# Altium PCB Arduino_MEGA_2560-Rev3.PcbDoc (part 2 of 2)
Units mil, origin at the board's own origin, x right, y up, seen from the top; angles counter-clockwise.
Board outline 4000 x 2100 mil, 2 copper layers (Top, Bottom); 63 components, 112 nets, 394 pads, 154 vias.
Unrouted connection lines stored in the file: 2.
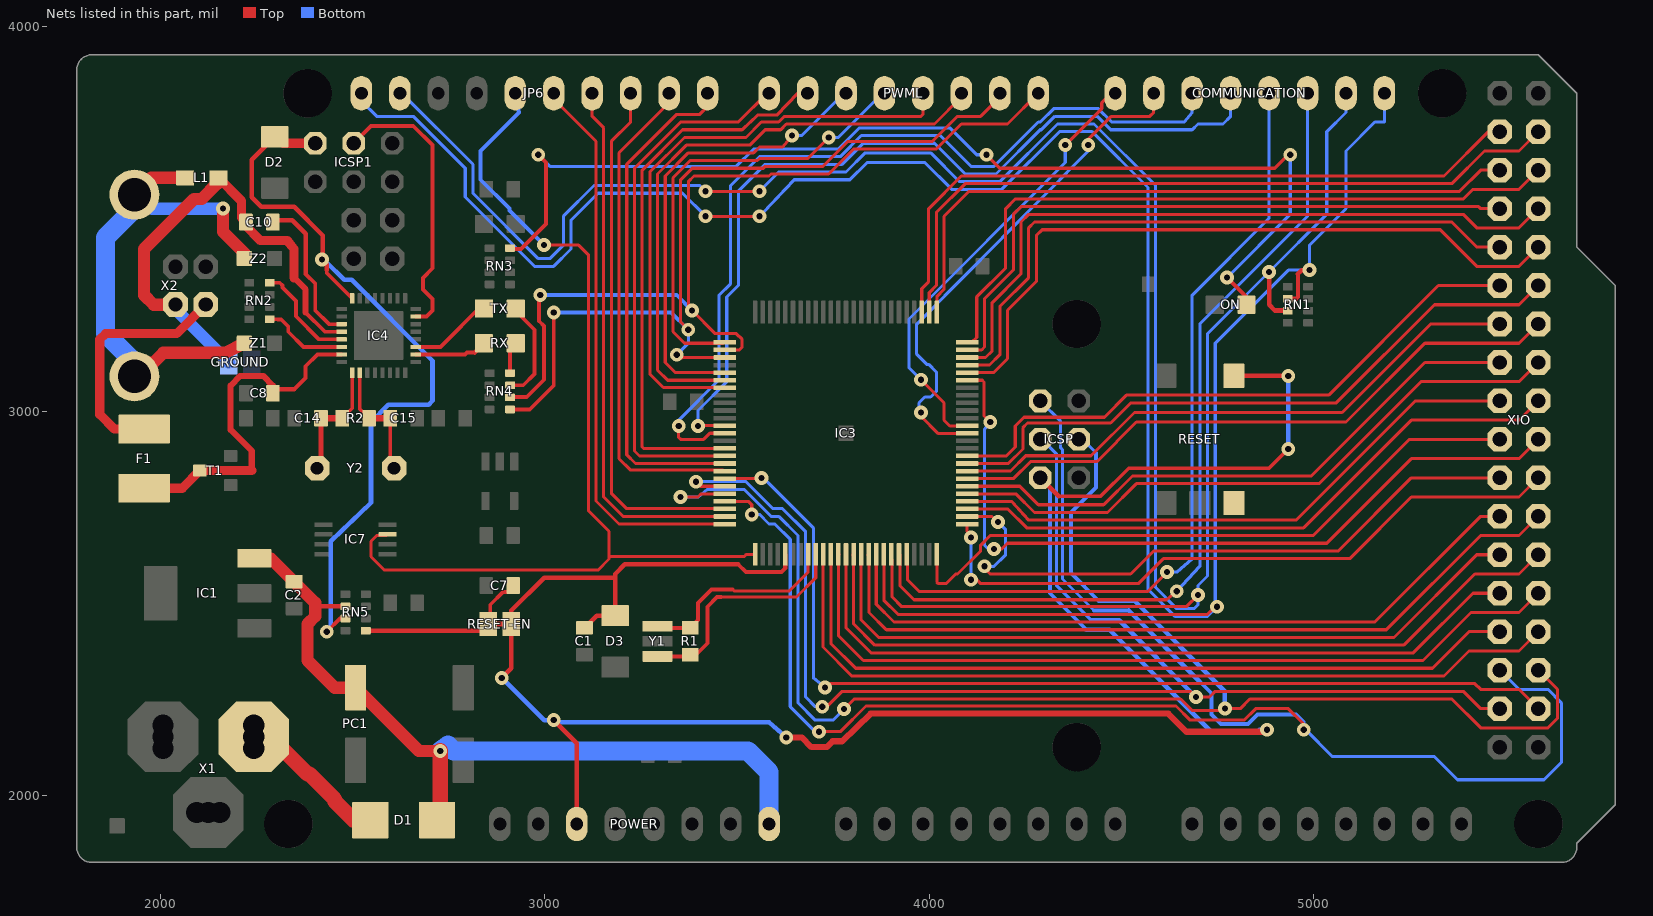
[diagram p2: the nets of this part, all layers, seen from the top]

## Via types
v1: diameter 36/36 (per signal layer), hole 16, Top to Bottom, 154 vias

## Nets (pads, with @x,y where several pads share a name; then routed paths per layer and width w, separated by ;. In a path a pad name is that pad's centre, name@x,y a point inside that pad or via, vN(x,y) a via of type N, cw(c..) or ccw(c..) an arc to the next point about the centre after c; other vN are vias at no path point) (continued)
N$3: ON.A RN3.8 | length 2854.3
  Top w8: v1(4148.46,3666.77) 4183.46,3631.77 4898.46,3631.77 4933.46,3666.77 v1(4938.46,3666.77) ; ON.A@4823.46,3286.77 ON.A@4824.8,3276.77
  Top w10: RN3.8@2910.03,3424.01 2920.78,3421.77 2938.46,3421.77 3003.46,3486.77 3003.46,3646.77 v1(2983.46,3666.77) ; v1(4774.09,3347.4) 4823.46,3298.03 ON.A@4823.46,3286.77
  Bottom w8: v1(2983.46,3666.77) 3013.46,3636.77 3498.46,3636.77 3543.46,3681.77 3763.46,3681.77 3818.46,3736.77 4053.46,3736.77 4123.46,3666.77 4143.46,3666.77 v1(4148.46,3666.77) ; v1(4774.09,3347.4) 4938.46,3511.77 v1(4938.46,3666.77)
N$54: RN4.4 RX.A | length 82.9
  Top w10: RN4.4@2910.03,3099.01 2910.03,3158.34 RX.A@2924.8,3176.77
N$55: RN4.3 TX.A | length 265.7
  Top w10: RN4.3@2910.03,3067.52 2944.21,3067.52 2973.46,3096.77 2973.46,3211.77 2924.8,3260.43 TX.A@2924.8,3266.77
PA0: IC3.78 XIO.3 | length 1844.4
  Top w8: IC3.78@3980.31,3257.73 3980.31,3318.62 3998.46,3336.77 3998.46,3526.77 4083.46,3611.77 5338.46,3611.77 5453.46,3726.77 XIO.3@5483.46,3726.77
PA1: IC3.77 XIO.4 | length 1918.7
  Top w8: IC3.77@4000,3257.73 4000,3308.31 4018.46,3326.77 4018.46,3516.77 4093.46,3591.77 5358.46,3591.77 5443.46,3676.77 5533.46,3676.77 XIO.4@5583.46,3726.77
PA2: IC3.76 XIO.5 | length 1751.5
  Top w8: IC3.76@4019.68,3257.73 4019.68,3297.99 4038.46,3316.77 4038.46,3506.77 4103.46,3571.77 5378.46,3571.77 5433.46,3626.77 XIO.5@5483.46,3626.77
PA3: IC3.75 XIO.6 | length 1822.8
  Top w8: IC3.75@4098.42,3178.99 4110.68,3178.99 4123.46,3191.77 4123.46,3297.4 4198.46,3372.4 4198.46,3526.77 4223.46,3551.77 5388.46,3551.77 5413.46,3576.77 5533.46,3576.77 XIO.6@5583.46,3626.77
PA4: IC3.74 XIO.7 | length 1699.6
  Top w8: IC3.74@4098.42,3159.31 4136,3159.31 4143.46,3166.77 4143.46,3292.4 4218.46,3367.4 4218.46,3511.77 4238.46,3531.77 5428.46,3531.77 5433.46,3526.77 XIO.7@5483.46,3526.77
PA5: IC3.73 XIO.8 | length 1826.7
  Top w8: IC3.73@4098.42,3139.62 4146.31,3139.62 4163.46,3156.77 4163.46,3282.4 4238.46,3357.4 4238.46,3491.77 4258.46,3511.77 5388.46,3511.77 5423.46,3476.77 5533.46,3476.77 XIO.8@5583.46,3526.77
PA6: IC3.72 XIO.9 | length 1715.4
  Top w8: IC3.72@4098.42,3119.94 4156.63,3119.94 4183.46,3146.77 4183.46,3272.4 4258.46,3347.4 4258.46,3476.77 4273.46,3491.77 5358.46,3491.77 5423.46,3426.77 XIO.9@5483.46,3426.77
PA7: IC3.71 XIO.10 | length 1842.5
  Top w8: IC3.71@4098.42,3100.25 4166.94,3100.25 4203.46,3136.77 4203.46,3262.4 4278.46,3337.4 4278.46,3456.77 4293.46,3471.77 5328.46,3471.77 5423.46,3376.77 5533.46,3376.77 XIO.10@5583.46,3426.77
PB0: IC3.19 XIO.34 | length 2613.5
  Top w8: IC3.19@3468.5,2824.66 3570.57,2824.66 v1(3563.46,2826.77) ; v1(3728.46,2281.77) 3733.46,2281.77 3743.46,2291.77 5418.46,2291.77 5433.46,2276.77 5533.46,2276.77 XIO.34@5583.46,2226.77
  Bottom w8: v1(3563.46,2826.77) 3568.46,2826.77 3698.46,2696.77 3698.46,2306.77 v1(3728.46,2281.77)
PB1: IC3.20 ICSP.3 XIO.33 | length 3594.7
  Top w8: v1(3393.46,2816.77) 3405.26,2804.97 IC3.20@3468.5,2804.97 ; v1(3721.65,2231.77) 3733.46,2231.77 3773.46,2271.77 4678.46,2271.77 v1(4693.46,2256.77) 4728.46,2256.77 4743.46,2271.77 5388.46,2271.77 5433.46,2226.77 XIO.33@5483.46,2226.77
  Bottom w8: v1(3393.46,2816.77) 3523.46,2816.77 3593.46,2746.77 3618.46,2746.77 3678.46,2686.77 3678.46,2256.77 3703.46,2231.77 v1(3721.65,2231.77) ; ICSP.3@4293.46,2926.77 4330.46,2889.77 4330.46,2547.57 4421.26,2456.77
  Bottom w10: ICSP.3@4288.46,2926.77 ICSP.3@4293.46,2926.77
  Bottom w12: 4421.26,2456.77 4493.46,2456.77 v1(4693.46,2256.77)
PB2: IC3.21 ICSP.4 XIO.32 | length 4115.2
  Top w8: v1(3353.46,2776.77) 3398.46,2776.77 3406.98,2785.29 IC3.21@3468.5,2785.29 ; v1(3778.46,2225.39) 3804.84,2251.77 4653.46,2251.77 4683.46,2221.77 4763.46,2221.77 v1(4768.46,2226.77) 4808.46,2226.77 4833.46,2251.77 5358.46,2251.77 5433.46,2176.77 5608.46,2176.77 5633.46,2201.77 5633.46,2276.77 XIO.32@5583.46,2326.77
  Bottom w8: v1(3353.46,2776.77) 3398.46,2776.77 3423.46,2796.77 3518.46,2796.77 3588.46,2726.77 3608.46,2726.77 3658.46,2676.77 3658.46,2241.77 3703.46,2196.77 3749.84,2196.77 v1(3778.46,2225.39) ; ICSP.4@4388.46,2926.77 4398.46,2926.77 4433.46,2891.77
  Bottom w10: 4433.46,2891.77 4433.46,2801.77 4368.46,2736.77 4368.46,2578.94 4440.63,2506.77
  Bottom w12: 4440.63,2506.77 4533.46,2506.77 4768.46,2271.77 v1(4768.46,2226.77)
PB3: IC3.22 ICSP.1 XIO.31 | length 4543.3
  Top w8: IC3.22@3468.5,2765.6 3529.63,2765.6 3538.46,2756.77 v1(3538.46,2731.77) ; v1(3713.46,2166.77) 3768.46,2166.77 3835.46,2233.77 4641.46,2233.77 4678.46,2196.77 4818.46,2196.77 4848.46,2226.77 4933.46,2226.77 4973.46,2186.77 v1(4973.46,2171.77)
  Bottom w8: v1(3538.46,2731.77) 3558.46,2731.77 3583.46,2706.77 3598.46,2706.77 3638.46,2666.77 3638.46,2231.77 3703.46,2166.77 v1(3713.46,2166.77) ; ICSP.1@4288.46,3026.77 4341.46,2973.77 4341.46,2904.77 4346.46,2899.77 4346.46,2563.77 4428.46,2481.77 ; v1(4973.46,2171.77) 4978.46,2171.77 5048.46,2101.77 5313.46,2101.77 5373.46,2041.77 5598.46,2041.77 5643.46,2086.77 5643.46,2241.77 5608.46,2276.77 5533.46,2276.77 XIO.31@5483.46,2326.77
  Bottom w10: 4428.46,2481.77 4518.46,2481.77 ; 4703.46,2296.77 4733.46,2266.77 4733.46,2211.77 4758.46,2186.77 4828.46,2186.77 4853.46,2211.77 4953.46,2211.77 4973.46,2191.77 v1(4973.46,2171.77)
  Bottom w12: 4518.46,2481.77 4703.46,2296.77
PB4: IC3.23 JP6.8 | length 1382.6
  Top w8: JP6.8@3223.46,3826.77 3223.46,3751.77 3173.46,3701.77 3173.46,2786.77 3213.46,2746.77 3473.46,2746.77 3472.61,2745.92 IC3.23@3468.5,2745.92
PB5: IC3.24 JP6.7 | length 1398.4
  Top w8: JP6.7@3123.46,3826.77 3123.46,3766.77 3153.46,3736.77 3153.46,2776.77 3204,2726.23 IC3.24@3468.5,2726.23
PB6: IC3.25 JP6.6 | length 1473.3
  Top w8: JP6.6@3023.46,3826.77 3033.46,3801.77 3133.46,3701.77 3133.46,2766.77 3193.46,2706.77 3473.46,2706.77 3473.24,2706.55 IC3.25@3468.5,2706.55
PB7: IC3.26 IC7.3 JP6.5 | length 2563.8
  Top w8: IC7.3@2591.65,2679.53 2588.89,2676.77 2563.46,2676.77 2548.46,2661.77 2548.46,2621.77 2583.46,2586.77 3138.46,2586.77 3167.42,2615.73 3167.42,2622.81 ; v1(2998.46,3431.77) 3088.46,3431.77 3113.46,3406.77 3113.46,2741.77 3167.42,2687.81 3167.42,2622.81 ; 3262.42,2621.77 3263.46,2622.81 ; IC3.26@3547.24,2627.81 3524.46,2627.77 3519.5,2622.81 3263.46,2622.81 ; 3167.42,2622.81 3263.46,2622.81
  Bottom w10: JP6.5@2923.46,3826.77 2933.46,3776.77 2833.46,3676.77 2833.46,3601.77 2908.46,3526.77 2908.46,3521.77 v1(2998.46,3431.77)
PC0: IC3.53 XIO.18 | length 1642.1
  Top w8: IC3.53@4098.42,2745.92 4204.31,2745.92 4253.46,2696.77 4973.46,2696.77 5253.46,2976.77 5533.46,2976.77 XIO.18@5583.46,3026.77
PC1: IC3.54 XIO.17 | length 1535.2
  Top w8: IC3.54@4098.42,2765.6 4214.63,2765.6 4258.46,2716.77 4953.46,2716.77 5263.46,3026.77 XIO.17@5483.46,3026.77
PC2: IC3.55 XIO.16 | length 1666.7
  Top w8: IC3.55@4098.42,2785.29 4224.94,2785.29 4273.46,2736.77 4463.46,2736.77 4538.46,2811.77 5013.46,2811.77 5278.46,3076.77 5533.46,3076.77 XIO.16@5583.46,3126.77
PC3: IC3.56 XIO.15 | length 1558.3
  Top w8: IC3.56@4098.42,2804.97 4235.26,2804.97 4283.46,2756.77 4453.46,2756.77 4528.46,2831.77 4993.46,2831.77 5288.46,3126.77 XIO.15@5483.46,3126.77
PC4: IC3.57 XIO.14 | length 1651.6
  Top w8: IC3.57@4098.42,2824.66 4218.46,2824.77 4263.46,2869.27 4436.46,2869.27 4538.46,2971.77 5083.46,2971.77 5288.46,3176.77 5533.46,3176.77 XIO.14@5583.46,3226.77
PC5: IC3.58 XIO.13 | length 1543.4
  Top w8: IC3.58@4098.42,2844.34 4211.03,2844.34 4250.46,2884.27 4420.46,2884.27 4533.46,2996.77 5073.46,2996.77 5303.46,3226.77 XIO.13@5483.46,3226.77
PC6: IC3.59 XIO.12 | length 1708.9
  Top w8: IC3.59@4098.42,2864.03 4205.72,2864.03 4243.46,2901.77 4243.46,2956.77 4255.46,2969.27 4471.46,2969.27 4524.46,3021.77 5058.46,3021.77 5313.46,3276.77 5533.46,3276.77 XIO.12@5583.46,3326.77
PC7: IC3.60 XIO.11 | length 1600.8
  Top w8: IC3.60@4098.42,2883.71 4200.4,2883.71 4223.46,2906.77 4223.46,2961.77 4246.46,2984.27 4455.46,2984.27 4512.46,3041.77 5038.46,3041.77 5323.46,3326.77 XIO.11@5483.46,3326.77
PD7: IC3.50 XIO.19 | length 1702.3
  Top w8: IC3.50@4019.68,2627.81 4019.68,2555.55 4023.46,2551.77 4043.46,2551.77 4068.46,2576.77 4073.46,2576.77 4133.46,2636.77 4133.46,2651.77 4157.46,2675.77 4157.46,2676.77 4998.46,2676.77 5248.46,2926.77 XIO.19@5483.46,2926.77
PE0: IC3.2 PWML.1 RN4.2 | length 2319.1
  Top w8: IC3.2@3468.5,3159.31 3506,3159.31 3513.46,3166.77 3513.46,3186.77 3498.46,3201.77 3443.46,3201.77 v1(3383.46,3261.77) 3373.46,3271.77 3373.46,3596.77 3388.46,3611.77 3583.46,3611.77 3588.46,3616.77 3738.46,3616.77 3803.46,3681.77 4018.46,3681.77 4083.46,3746.77 4203.46,3746.77 PWML.1@4283.46,3826.77
  Top w10: RN4.2@2910.03,3036.02 2910.78,3036.77 2953.46,3036.77 2998.46,3081.77 2998.46,3221.77 2985.7,3234.01 2985.7,3299.01 v1(2988.46,3301.77)
  Bottom w10: v1(2988.46,3301.77) 3343.46,3301.77 v1(3383.46,3261.77)
PE1: IC3.3 PWML.2 RN4.1 | length 2233
  Top w8: v1(3343.46,3146.77) 3353.46,3136.77 3356.31,3139.62 IC3.3@3468.5,3139.62 ; v1(3373.46,3211.77) 3353.46,3231.77 3353.46,3601.77 3383.46,3631.77 3568.46,3631.77 3573.46,3636.77 3723.46,3636.77 3788.46,3701.77 4008.46,3701.77 4073.46,3766.77 4133.46,3766.77 4183.46,3816.77 PWML.2@4183.46,3826.77
  Top w10: RN4.1@2910.03,3004.53 2961.22,3004.53 3023.46,3066.77 v1(3023.46,3256.77)
  Bottom w8: v1(3343.46,3146.77) 3373.46,3176.77 v1(3373.46,3211.77)
  Bottom w10: v1(3023.46,3256.77) 3328.46,3256.77 v1(3373.46,3211.77)
PE3: IC3.5 PWML.6 | length 1211.7
  Top w8: IC3.5@3468.5,3100.25 3339.98,3100.25 3313.46,3126.77 3313.46,3611.77 3373.46,3671.77 3543.46,3671.77 3558.46,3686.77 3618.46,3686.77 v1(3643.46,3716.77)
  Bottom w8: v1(3643.46,3716.77) 3668.46,3716.77 3778.46,3826.77 PWML.6@3783.46,3826.77
PE4: IC3.6 PWML.3 | length 1578.7
  Top w8: IC3.6@3468.5,3080.57 3319.66,3080.57 3293.46,3106.77 3293.46,3616.77 3368.46,3691.77 3533.46,3691.77 3573.46,3731.77 3613.46,3731.77 3628.46,3746.77 4013.46,3746.77 4083.46,3816.77 PWML.3@4083.46,3826.77
PE5: IC3.7 PWML.4 | length 1561.7
  Top w8: IC3.7@3468.5,3060.88 3467.57,3060.88 3458.46,3061.77 3308.46,3061.77 3273.46,3096.77 3273.46,3621.77 3363.46,3711.77 3523.46,3711.77 3563.46,3751.77 3608.46,3751.77 3623.46,3766.77 3978.46,3766.77 3983.46,3771.77 PWML.4@3983.46,3826.77
PG0: IC3.51 XIO.22 | length 1740.9
  Top w8: IC3.51@4098.42,2706.55 4098.42,2686.81 v1(4108.46,2671.77) ; v1(4108.46,2561.77) 4123.46,2561.77 4133.46,2551.77 4543.46,2551.77 4553.46,2561.77 4588.46,2596.77 4608.46,2616.77 5093.46,2616.77 5253.46,2776.77 5533.46,2776.77 XIO.22@5583.46,2826.77
  Bottom w8: v1(4108.46,2561.77) v1(4108.46,2671.77)
PG1: IC3.52 XIO.21 | length 1701.2
  Top w8: IC3.52@4098.42,2726.23 4162.92,2726.23 v1(4178.46,2711.77) ; v1(4143.46,2596.77) 4143.46,2591.77 4158.46,2576.77 4523.46,2576.77 4583.46,2636.77 5063.46,2636.77 5253.46,2826.77 XIO.21@5483.46,2826.77
  Bottom w8: v1(4143.46,2596.77) 4168.46,2596.77 4198.46,2626.77 4198.46,2691.77 v1(4178.46,2711.77)
PG2: IC3.70 XIO.20 | length 2043.8
  Top w8: IC3.70@4098.42,3080.57 4137.66,3080.57 4142.46,3075.77 4142.46,2987.77 v1(4158.46,2971.77) ; v1(4168.46,2641.77) 4188.46,2641.77 4203.46,2656.77 5033.46,2656.77 5253.46,2876.77 5533.46,2876.77 XIO.20@5583.46,2926.77
  Bottom w8: v1(4158.46,2971.77) 4143.46,2951.77 4143.46,2651.77 4153.46,2641.77 v1(4168.46,2641.77)
PG5: IC3.1 PWML.5 | length 1189.5
  Top w8: IC3.1@3468.5,3178.99 3465.68,3178.99 3463.46,3176.77 3363.46,3176.77 3333.46,3206.77 3333.46,3606.77 3378.46,3651.77 3553.46,3651.77 3558.46,3656.77 3683.46,3656.77 v1(3738.46,3711.77)
  Bottom w8: v1(3738.46,3711.77) 3763.46,3711.77 3878.46,3826.77 PWML.5@3883.46,3826.77
PH3: IC3.15 PWML.7 | length 1449.3
  Top w8: IC3.15@3468.5,2903.4 3256.83,2903.4 3253.46,2906.77 3253.46,3626.77 3358.46,3731.77 3513.46,3731.77 3553.46,3769.77 3603.46,3769.77 3658.46,3826.77 PWML.7@3683.46,3826.77
PH4: IC3.16 PWML.8 | length 1406.2
  Top w8: IC3.16@3468.5,2883.71 3246.52,2883.71 3233.46,2896.77 3233.46,3631.77 3353.46,3751.77 3503.46,3751.77 3578.46,3826.77 PWML.8@3583.46,3826.77
PH5: IC3.17 JP6.10 | length 1326.6
  Top w8: JP6.10@3423.46,3826.77 3423.46,3791.77 3403.46,3771.77 3343.46,3771.77 3213.46,3641.77 3213.46,2886.77 3236.2,2864.03 IC3.17@3468.5,2864.03
PH6: IC3.18 JP6.9 | length 1292.3
  Top w8: JP6.9@3323.46,3826.77 3323.46,3801.77 3193.46,3671.77 3193.46,2876.77 3223.46,2846.77 3463.46,2846.77 3465.89,2844.34 IC3.18@3468.5,2844.34
PL0: IC3.35 XIO.30 | length 2180.3
  Top w8: IC3.35@3723.46,2625.77 3723.46,2386.77 3798.46,2311.77 5338.46,2311.77 5403.46,2376.77 5533.46,2376.77 XIO.30@5583.46,2426.77
  Top w10: IC3.35@3723.46,2625.77 3724.46,2626.77 3724.5,2627.81 IC3.35@3724.4,2627.81
PL1: IC3.36 XIO.29 | length 2037.1
  Top w8: IC3.36@3744.09,2627.81 3744.09,2396.14 3808.46,2331.77 5308.46,2331.77 5403.46,2426.77 XIO.29@5483.46,2426.77
PL2: IC3.37 XIO.28 | length 2131.6
  Top w8: IC3.37@3763.46,2625.77 3763.46,2416.77 3828.46,2351.77 5283.46,2351.77 5408.46,2476.77 5533.46,2476.77 XIO.28@5583.46,2526.77
  Top w10: IC3.37@3763.46,2625.77 3762.46,2626.77 3763.5,2627.81 IC3.37@3763.77,2627.81
PL3: IC3.38 XIO.27 | length 1982.2
  Top w8: IC3.38@3783.46,2627.81 3783.46,2436.77 3848.46,2371.77 5258.46,2371.77 5413.46,2526.77 XIO.27@5483.46,2526.77
PL4: IC3.39 XIO.26 | length 2082.1
  Top w8: IC3.39@3803.46,2622.77 3803.46,2446.77 3858.46,2391.77 5233.46,2391.77 5418.46,2576.77 5533.46,2576.77 XIO.26@5583.46,2626.77
  Top w10: IC3.39@3803.15,2627.81 3803.15,2625.09 3804.46,2623.77 IC3.39@3803.46,2622.77
PL5: IC3.40 XIO.25 | length 1939
  Top w8: IC3.40@3822.83,2627.81 3822.83,2457.4 3868.46,2411.77 5208.46,2411.77 5423.46,2626.77 XIO.25@5483.46,2626.77
PL6: IC3.41 XIO.24 | length 2033.1
  Top w8: IC3.41@3843.46,2623.77 3843.46,2476.77 3888.46,2431.77 5188.46,2431.77 5433.46,2676.77 5533.46,2676.77 XIO.24@5583.46,2726.77
  Top w10: IC3.41@3842.52,2627.81 3842.52,2626.83 3841.46,2625.77 IC3.41@3843.46,2623.77
PL7: IC3.42 XIO.23 | length 1884.1
  Top w8: IC3.42@3862.2,2627.81 3862.2,2498.03 3908.46,2451.77 5158.46,2451.77 5433.46,2726.77 XIO.23@5483.46,2726.77
PWRIN: D1.A X1.2 X1.8 X1.9 | length 396.2
  Top w40: X1.2@2243.46,2153.77 2270.46,2126.77 2313.46,2126.77 2383.46,2056.77 2388.46,2056.77 2453.46,1991.77 2453.46,1986.77 2503.46,1936.77 D1.A@2546.85,1936.77
RD+: IC4.29 RN2.4 | length 274.3
  Top w10: RN2.4@2285.03,3334.01 2311.22,3334.01 2318.46,3326.77 2318.46,3321.77 2353.46,3286.77 2353.46,3246.77 2413.3,3186.93 IC4.29@2472,3186.93
RD-: IC4.30 RN2.1 | length 224.1
  Top w10: RN2.1@2285.03,3239.53 2306.26,3238.31 2315,3238.31 2333.46,3219.84 2333.46,3206.77 2372.99,3167.24 IC4.30@2472,3167.24
RESET: C1.1 C7.2 D3.A IC3.30 ICSP.5 POWER.3 RESET-EN.1 RESET-EN.2 RESET.3 RESET.4 RN5.1 | length 6224.1
  Top w10: RESET-EN.1@2853.46,2446.77 2858.46,2451.77 2858.46,2496.77 2891.92,2530.23 C7.2@2916.92,2530.23 ; 3503.46,2601.77 3523.46,2581.77 3615.46,2581.77 3625.98,2592.29 ; 4336.46,2778.77 4445.46,2778.77 4518.46,2851.77 4883.46,2851.77 v1(4933.46,2901.77)
  Top w12: RN5.1@2535.03,2429.53 2836.22,2429.53 RESET-EN.1@2853.46,2446.77 ; RESET-EN.1@2858.46,2431.77 RESET-EN.1@2853.46,2446.77 ; v1(2888.46,2306.77) 2913.46,2331.77 RESET-EN.2@2913.46,2446.77 ; C7.2@2916.92,2530.23 C7.2@2918.46,2546.77 ; v1(3023.46,2196.77) 3083.46,2136.77 POWER.3@3083.46,1926.77 ; C1.1@3103.46,2436.77 3135.39,2468.7 D3.A@3183.46,2468.7 3183.46,2566.77 ; 3503.46,2601.77 3208.46,2601.77 3183.46,2576.77 3183.46,2566.77 ; 3625.98,2592.29 IC3.30@3625.98,2627.81 ; ICSP.5@4288.46,2826.77 4336.46,2778.77 ; RESET.4@4792.04,3092.12 4792.4,3091.77 v1(4933.46,3091.77) ; RESET-EN.1@2853.46,2446.77 RESET-EN.2@2913.46,2446.77 ; RESET-EN.2@2913.46,2446.77 2913.46,2481.77 2998.46,2566.77 3183.46,2566.77
  Top w16: v1(3628.15,2152.09) 3668.46,2151.77 3693.46,2126.77 3733.46,2126.77 3748.46,2141.77 3773.46,2141.77 3847.46,2213.77 4621.46,2213.77 4668.46,2166.77 4873.46,2166.77 v1(4878.46,2171.77)
  Bottom w10: ICSP.5@4293.46,2821.77 4313.46,2801.77 4313.46,2526.77 4408.46,2431.77
  Bottom w12: v1(2888.46,2306.77) 2998.46,2196.77 v1(3023.46,2196.77) 3028.46,2191.77 3583.46,2191.77 v1(3628.15,2152.09) ; ICSP.5@4288.46,2826.77 ICSP.5@4293.46,2821.77 ; 4408.46,2431.77 4468.46,2431.77 4733.46,2166.77 4853.46,2166.77 4858.46,2171.77 v1(4878.46,2171.77) ; v1(4933.46,2901.77) v1(4933.46,3091.77)
RESET2: D2.A IC4.24 ICSP1.5 RN5.7 | length 2100.4
  Top w10: v1(2433.46,2426.77) 2467.71,2461.02 RN5.7@2481.89,2461.02 ; 2433.46,3366.77 2433.46,3359.33 IC4.24@2499.56,3293.23
  Top w12: D2.A@2298.46,3713.7 2238.46,3653.7 2238.46,3556.77 2263.46,3531.77 2348.46,3531.77 2423.46,3456.77 2423.46,3391.77 v1(2420.96,3394.27) 2433.46,3381.77 2433.46,3366.77 ; 2373.46,3696.77 ICSP1.5@2403.46,3696.77 ; v1(2433.46,2426.77) v1@2436.22,2429.53
  Top w24: D2.A@2298.46,3713.7 2320.39,3696.77 ICSP1.5@2403.46,3696.77
  Bottom w12: v1(2420.96,3394.27) 2430.96,3389.27 2478.46,3341.77 2497.89,3341.77 2708.46,3131.2 2708.46,3026.77 2698.46,3016.77 2593.46,3016.77 2548.46,2971.77 2548.46,2761.77 2443.46,2661.77 2443.46,2426.77 v1(2433.46,2426.77)
RXD1: COMMUNICATION.3 IC3.45 | length 2260.2
  Top w8: IC3.45@3921.26,2627.81 3922.42,2627.81 3923.46,2626.77 3923.46,2546.77 3960.46,2509.77 4616.46,2509.77 v1(4643.46,2531.77)
  Bottom w8: v1(4643.46,2531.77) 4703.46,2596.77 4703.46,3226.77 4983.46,3506.77 COMMUNICATION.3@4983.46,3826.77
RXD2: COMMUNICATION.5 IC3.12 | length 2239.9
  Top w8: v1(3398.46,2961.77) 3399.15,2962.46 IC3.12@3468.5,2962.46
  Bottom w8: v1(3398.46,2961.77) 3398.46,3001.77 3473.46,3076.77 3473.46,3296.77 3503.46,3326.77 3503.46,3571.77 3573.46,3641.77 3773.46,3641.77 3828.46,3696.77 4013.46,3696.77 4093.46,3616.77 4173.46,3616.77 4288.46,3731.77 4291.46,3731.77 4326.46,3766.77 4436.46,3766.77 4471.46,3731.77 4683.46,3731.77 4698.46,3746.77 4763.46,3746.77 4783.46,3766.77 COMMUNICATION.5@4783.46,3826.77
RXD3: COMMUNICATION.7 IC3.63 | length 1346
  Top w8: v1(3978.46,2996.77) 3978.46,2986.77 4023.46,2941.77 4098.46,2941.77 IC3.63@4098.42,2942.77 ; v1(4413.46,3691.77) 4413.46,3706.77 4473.46,3766.77 4573.46,3766.77 4583.46,3776.77 COMMUNICATION.7@4583.46,3826.77
  Bottom w8: v1(3978.46,2996.77) 3973.46,3001.77 3973.46,3021.77 3988.46,3036.77 4003.46,3036.77 4018.46,3051.77 4018.46,3101.77 3998.46,3121.77 3993.46,3121.77 3966.46,3149.77 3966.46,3224.77 4413.46,3676.77 v1(4413.46,3691.77)
RXL: IC4.10 RX.C | length 189.3
  Top w10: IC4.10@2664.92,3147.56 2792.67,3147.56 2797.67,3152.56 2817.91,3152.56
  Top w12: 2817.91,3152.56 RX.C@2842.12,3176.77
SCK2: IC4.15 ICSP1.3 | length 745.1
  Top w10: ICSP1.3@2503.46,3696.77 2548.46,3741.77 2658.46,3741.77 2708.46,3691.77 2708.46,3371.77 2683.46,3346.77 2683.46,3316.77 2708.46,3291.77 2708.46,3261.77 2692.67,3245.98 IC4.15@2664.92,3245.98
SCL: COMMUNICATION.1 IC3.43 JP6.1 RN1.2 | length 6606.8
  Top w8: v1(3418.46,3506.77) v1(3558.46,3506.77) ; IC3.43@3881.89,2627.81 3881.89,2508.34 3918.46,2471.77 4723.46,2471.77 4738.46,2486.77 v1(4748.46,2491.77)
  Top w10: 4954.21,3292.52 4958.46,3296.77 4958.46,3356.77
  Top w12: RN1.2@4931.89,3292.52 4954.21,3292.52 ; 4958.46,3356.77 4968.46,3366.77 v1(4988.46,3366.77)
  Bottom w8: JP6.1@2523.46,3826.77 2523.46,3806.77 2563.46,3766.77 2658.46,3766.77 2793.46,3631.77 2793.46,3556.77 2973.46,3376.77 3023.46,3376.77 3068.46,3421.77 3068.46,3496.77 3138.46,3566.77 3358.46,3566.77 v1(3418.46,3506.77) ; v1(3558.46,3506.77) 3568.46,3516.77 3648.46,3601.77 3793.46,3601.77 3838.46,3646.77 3988.46,3646.77 4058.46,3576.77 4188.46,3576.77 4338.46,3726.77 4423.46,3726.77 4568.46,3581.77 4568.46,2536.77 4638.46,2466.77 4723.46,2466.77 v1(4748.46,2491.77) 4743.46,2496.77 4743.46,3176.77 4933.46,3366.77 v1(4988.46,3366.77) 4988.46,3431.77 5083.46,3526.77 5083.46,3676.77 5158.46,3751.77 5183.46,3751.77 COMMUNICATION.1@5183.46,3826.77
SDA: COMMUNICATION.2 IC3.44 JP6.2 RN1.3 | length 6257.4
  Top w8: v1(3418.46,3571.77) v1(3558.46,3571.77) ; IC3.44@3901.57,2627.81 3901.57,2619.88 3901.46,2615.77 3903.46,2611.77 3903.46,2516.77 3928.46,2491.77 4668.46,2491.77 v1(4698.46,2521.77)
  Top w12: v1(4883.46,3361.77) 4883.46,3276.77 4898.46,3261.77 4931.14,3261.77 RN1.3@4931.89,3261.02
  Bottom w8: JP6.2@2623.46,3826.77 2628.46,3826.77 2813.46,3641.77 2813.46,3566.77 2983.46,3396.77 3013.46,3396.77 3048.46,3431.77 3048.46,3506.77 3128.46,3586.77 3403.46,3586.77 v1(3418.46,3571.77) ; v1(3558.46,3571.77) 3608.46,3621.77 3783.46,3621.77 3833.46,3671.77 4003.46,3671.77 4078.46,3596.77 4183.46,3596.77 4333.46,3746.77 4428.46,3746.77 4588.46,3586.77 4588.46,2541.77 4643.46,2486.77 4688.46,2486.77 4698.46,2496.77 v1(4698.46,2521.77) 4698.46,2546.77 4723.46,2571.77 4723.46,3201.77 v1(4883.46,3361.77) 5033.46,3511.77 5033.46,3726.77 5083.46,3776.77 COMMUNICATION.2@5083.46,3826.77
TXD1: COMMUNICATION.4 IC3.46 | length 2146.2
  Top w8: IC3.46@3940.94,2627.81 3940.94,2624.29 3943.46,2621.77 3943.46,2561.77 3973.46,2531.77 4568.46,2531.77 v1(4618.46,2581.77)
  Bottom w8: v1(4618.46,2581.77) 4643.46,2581.77 4683.46,2616.77 4683.46,3301.77 4883.46,3501.77 COMMUNICATION.4@4883.46,3826.77
TXD2: COMMUNICATION.6 IC3.13 | length 2265.3
  Top w8: v1(3348.46,2961.77) 3348.46,2931.77 3353.46,2926.77 3413.46,2926.77 3429.46,2942.77 IC3.13@3468.5,2942.77
  Bottom w8: v1(3348.46,2961.77) 3348.46,2976.77 3453.46,3081.77 3453.46,3301.77 3483.46,3331.77 3483.46,3586.77 3558.46,3661.77 3768.46,3661.77 3823.46,3716.77 4028.46,3716.77 4108.46,3636.77 4168.46,3636.77 4283.46,3751.77 4288.46,3751.77 4323.46,3786.77 4439.46,3786.77 4474.46,3751.77 4663.46,3751.77 4683.46,3776.77 COMMUNICATION.6@4683.46,3826.77
TXD3: COMMUNICATION.8 IC3.64 | length 1181.5
  Top w8: v1(3978.46,3081.77) 4038.46,3021.77 4038.46,2976.77 4053.46,2961.77 4088.46,2961.77 4092.78,2962.46 IC3.64@4098.42,2962.46 ; v1(4353.46,3691.77) 4448.46,3786.77 4448.46,3801.77 4473.46,3826.77 COMMUNICATION.8@4483.46,3826.77
  Bottom w8: v1(3978.46,3081.77) 3947.46,3112.77 3947.46,3239.77 4353.46,3646.77 v1(4353.46,3691.77)
TXL: IC4.11 TX.C | length 229.6
  Top w10: IC4.11@2664.92,3167.24 2728.93,3167.24 2838.46,3276.77 TX.C@2842.12,3266.77
UGND: C10.2 GROUND.1 IC4.28 L1.1 X2.4 | length 1297.4
  Top w10: 2378.46,3256.77 2428.62,3206.61 IC4.28@2472,3206.61
  Top w16: 2348.46,3346.77 2378.46,3316.77 2378.46,3256.77
  Top w24: L1.1@2151.77,3606.77 2211.77,3546.77 2211.77,3503.46 C10.2@2223.46,3491.77 2220,3485.23 2260.46,3443.77 2330.46,3443.77 2348.46,3421.77 2348.46,3346.77
  Top w32: X2.4@2040.15,3277.56 2039.37,3276.77 1983.46,3276.77 1958.46,3301.77 1958.46,3421.77 2088.46,3551.77 2108.46,3551.77 2148.46,3591.77 2148.46,3603.46 L1.1@2151.77,3606.77
  Bottom w32: X2.4@2040.15,3277.56 2040.15,3265.08 GROUND.1@2178.46,3126.77
USBVCC: C8.1 F1.1 IC4.31 T1.1 | length 931.3
  Top w10: 2348.46,3056.77 2378.46,3086.77 2378.46,3116.77 2409.25,3147.56 IC4.31@2472,3147.56
  Top w12: C8.1@2293.46,3046.77 2303.46,3056.77 2348.46,3056.77
  Top w16: 2238.46,2845.77 2238.46,2896.77 2183.46,2951.77 2183.46,3066.77 2208.46,3091.77 2268.46,3091.77 2293.46,3066.77 C8.1@2293.46,3046.77
  Top w24: F1.1@1958.46,2800 2057.69,2800 T1.1@2103.46,2845.77 2238.46,2845.77
USHIELD: L1.2 X2.P$1 X2.P$2 Z1.1 Z2.1 | length 1418
  Top w32: X2.P$2@1933.46,3090.55 1933.46,3126.77 1983.46,3126.77 2008.46,3151.77 2169.09,3151.77 Z1.1@2219.09,3176.77 ; X2.P$1@1933.46,3562.99 1977.24,3606.77 L1.2@2065.15,3606.77 ; v1(2163.46,3526.77) 2163.46,3466.77 2219.09,3411.14 Z2.1@2219.09,3396.77
  Bottom w32: X2.P$1@1933.46,3562.99 1979.68,3526.77 v1(2163.46,3526.77)
  Bottom w50: X2.P$2@1933.46,3090.55 1933.46,3126.77 1858.46,3201.77 1858.46,3451.77 1933.46,3526.77 X2.P$1@1933.46,3562.99
VIN: C2.1 D1.C IC1.3 PC1.+ POWER.8 RN5.6 | length 2096.4
  Top w8: IC1.3@2245.46,2617.77 IC1.3@2246.7,2616.53
  Top w12: 2403.46,2501.77 2412.71,2492.52 RN5.6@2481.89,2492.52
  Top w32: IC1.3@2246.7,2616.53 2288.7,2616.53 C2.1@2348.46,2556.77 2403.46,2501.77 2403.46,2466.77 2383.46,2446.77 2383.46,2351.77 2453.97,2281.26 PC1.+@2508.46,2281.26 2672.95,2116.77 v1(2728.46,2116.77)
  Top w40: D1.C@2720.07,1936.77 2728.46,1945.16 v1(2728.46,2116.77)
  Bottom w50: v1(2728.46,2116.77) 2748.46,2131.77 2763.46,2116.77 3528.46,2116.77 3583.46,2061.77 POWER.8@3583.46,1926.77
VUCAP: C10.1 IC4.27 | length 394.5
  Top w10: 2378.46,3356.77 2403.46,3331.77 2403.46,3261.77 2438.93,3226.3 IC4.27@2472,3226.3
  Top w12: C10.1@2293.46,3491.77 2301.92,3496.77 2343.46,3496.77 2378.46,3461.77 2378.46,3356.77
XT1: C14.1 IC4.1 R2.1 Y2.2 | length 329.4
  Top w10: R2.1@2484.35,2981.77 R2.1@2473.46,2981.77 2499.56,3007.87 IC4.1@2499.56,3100.31
  Top w12: Y2.2@2408.46,2851.77 2418.46,2861.77 C14.1@2418.46,2981.77
  Top w16: C14.1@2418.46,2981.77 R2.1@2473.46,2981.77
XT2: C15.1 IC4.2 R2.2 Y2.1 | length 317.7
  Top w10: IC4.2@2519.25,3100.31 2519.25,3005.98 R2.2@2543.46,2981.77 ; C15.1@2598.46,2981.77 2598.46,2861.77 Y2.1@2608.46,2851.77
  Top w16: R2.2@2543.46,2981.77 C15.1@2598.46,2981.77
XTAL1: IC3.34 R1.1 Y1.3 | length 611.2
  Top w8: 3458.46,2516.77 3654.72,2516.77 3704.72,2566.77 IC3.34@3704.72,2627.81
  Top w10: Y1.3@3293.46,2362.4 3354.09,2362.4 R1.1@3378.46,2366.77 3393.46,2366.77 3423.46,2396.77 3423.46,2491.77 3448.46,2516.77 3458.46,2516.77
XTAL2: IC3.33 R1.2 Y1.1 | length 581
  Top w8: 3488.46,2536.77 3492.46,2532.77 3636.03,2532.77 3685.03,2581.77 IC3.33@3685.03,2627.81
  Top w10: Y1.1@3272.83,2441.14 Y1.1@3293.46,2441.14 3277.83,2441.14 3282.2,2436.77 R1.2@3378.46,2436.77 3398.46,2456.77 3398.46,2501.77 3433.46,2536.77 3488.46,2536.77
XVCC: F1.2 X2.1 | length 638.9
  Top w24: F1.2@1958.46,2953.54 1881.69,2953.54 1843.46,2991.77 1843.46,3186.77 1858.46,3201.77 2043.11,3201.77 X2.1@2118.89,3277.56
pads on no net: FD1.P$1 FD2.P$1 FD3.P$1 FD4.P$1 IC3.4 IC3.8 IC3.9 IC3.14 IC3.27 IC3.28 IC3.29 IC3.47 IC3.48 IC3.49 IC3.65 IC3.66 IC3.67 IC3.68 IC3.69 IC3.79 IC4.5 IC4.6 IC4.7 IC4.12 IC4.14 IC4.22 IC4.23 IC4.25 IC4.26 IC6.4 POWER.1 RN1.1 RN1.4 RN1.5 RN1.8 RN2.2 RN2.3 RN2.6 RN2.7 RN3.3 RN3.6

## Polygon pours and split planes (outlines as drawn)
N$1 on Top "Polygon_1_Net_N$1" (solid, remove dead copper, pour order 0): 1804.46,3905.77 2208.46,3905.77 2227.46,3905.77 2227.46,3667.77 1804.46,3667.77
GND on Top "Polygon_1_Net_GND" (solid, remove dead copper, pour order 3): 1804.46,3905.77 5787.46,3905.77 5787.46,1847.77 1804.46,1847.77 1804.46,3005.77 2204.46,3005.77 2204.46,3647.77 1804.46,3647.77
+5V on Top "Polygon_1_Net_+5V" (solid, remove dead copper, pour order 1): 2164.46,2345.77 2164.46,3007.77 1802.46,3007.77 1802.46,2345.77
GND on Bottom "Polygon_2_Net_GND" (solid, remove dead copper, pour order 4): 1804.46,3905.77 5785.12,3905.77 5812.46,3878.43 5812.46,1847.77 1831.8,1847.77 1804.46,1875.11 1804.46,3005.77 2204.46,3005.77 2204.46,3647.77 1804.46,3647.77
+5V on Bottom "Polygon_2_Net_+5V" (solid, remove dead copper, pour order 2): 1827.46,2345.77 1827.46,3007.77 2214.46,3007.77 2214.46,2345.77

## Keep-outs
Keep-Out Layer:
  the board outline again, w10

## Other copper
Top:
  text "MEGAXL-Rev3b" at 1860.02,1980.69 h27.2 r90

## Silkscreen, mask and mechanical layers (free items; w line width, h text height)
Top Overlay:
  lines w16: 4158.46,3626.77 4183.46,3651.77 ; 4158.46,3626.77 4183.46,3626.77 ; 4158.46,3626.77 4183.46,3676.77 4208.46,3626.77 ; 4183.46,3626.77 4208.46,3626.77 ; 4183.46,3626.77 4183.46,3651.77 ; 4183.46,3651.77 4208.46,3626.77 ; 4258.46,3676.77 4283.46,3651.77 ; 4258.46,3676.77 4283.46,3626.77 4308.46,3676.77 ; 4258.46,3676.77 4283.46,3676.77 ; 4283.46,3651.77 4283.46,3676.77 ; 4283.46,3651.77 4308.46,3676.77 ; 4283.46,3676.77 4308.46,3676.77
  text "SCL" at 2522.29,3981.25 h47.6 r90
  text "SDA" at 2632.29,3976.25 h47.6 r90
  text "M.Banzi" at 1522.66,3888.53 h38.25
  text "5V" at 5401.15,3874.38 h37.4
  text "D.Cuartielles" at 1305.98,3813.53 h38.25
  text "MADE IN" at 1843.46,3806.77 h59.5
  text "T.Igoe" at 1554.53,3751.28 h38.25
  text "ITALY" at 1923.46,3686.77 h59.5
  text "G.Martino" at 1446.19,3663.53 h38.25
  text "GND" at 2862.71,3617.25 h47.6 r90
  text "D.Mellis" at 1490.8,3588.53 h38.25
  text "PWM" at 3408.46,3566.77 h56.1
  text "AREF" at 2757.29,3566.25 h47.6 r90
  text "TX" at 4208.46,3496.77 h47.6 r90
  text "RX" at 4308.46,3496.77 h47.6 r90
  text "TX3" at 4508.46,3496.77 h47.6 r90
  text "RX3" at 4608.46,3496.77 h47.6 r90
  text "TX2" at 4708.46,3496.77 h47.6 r90
  text "RX2" at 4808.46,3496.77 h47.6 r90
  text "TX1" at 4908.46,3496.77 h47.6 r90
  text "RX1" at 5008.46,3496.77 h47.6 r90
  text "SDA" at 5108.46,3496.77 h47.6 r90
  text "SCL" at 5208.46,3496.77 h47.6 r90
  text "1" at 4228.97,3013.8 h42.5
  text "DIGITAL" at 5308.46,2751.77 h56.1 r90
  text "Arduino" at 3758.46,2376.77 h93.5
  text "MEGA 2560" at 3758.46,2226.77 h106.25
  text "ANALOG   IN" at 3958.46,2116.77 h56.1
  text "GND" at 5623.46,2026.77 h47.6
  text "5V" at 3242.94,1994.94 h47.6
  text "GND" at 3362.94,1994.94 h47.6
  text "VIN" at 3534.94,1994.94 h47.6
  text "IOREF" at 3007.29,1994.25 h47.6 r90
  text "RESET" at 3112.29,1994.25 h47.6 r90
  text "3V3" at 3212.29,1994.25 h47.6 r90
Bottom Overlay:
  text "MADE IN" at 3933.46,3051.77 h86.8
  text "designed by" at 5333.46,3026.77 h86.8
  text "ITALY" at 3883.46,2976.77 h86.8
  text "tinker it" at 5258.46,2951.77 h47.6
Dimension:
  the board outline again, w10
Unrouted:
  lines w0: 4792.04,2761.42 4883.46,2851.77
Top Assembly:
  circle w12: c2658.46,3736.77 r7.07
  lines w12: 2938.46,3636.77 2973.46,3601.77 3383.46,3601.77 ; 3603.46,3601.77 4043.46,3601.77 4083.46,3641.77 ; 3788.46,2106.77 3828.46,2146.77 3908.46,2146.77 ; 4188.46,3486.77 4233.46,3441.77 4283.46,3441.77 ; 4643.46,2146.77 5328.46,2146.77 5363.46,2111.77 ; 5068.46,3441.77 5138.46,3441.77 5183.46,3486.77 ; 5278.46,2731.77 5278.46,2271.77 5318.46,2231.77 ; 5278.46,3146.77 5278.46,3686.77 5318.46,3726.77 ; 5483.46,2051.77 5483.46,2031.77 5583.46,2031.77 5583.46,2051.77 ; 5483.46,3876.77 5483.46,3901.77 5583.46,3901.77 5583.46,3876.77
  text "9" at 3358.46,3701.77 h47.6 r90
  text "8" at 3458.46,3701.77 h47.6 r90
  text "7" at 3608.46,3701.77 h47.6 r90
  text "6" at 3708.46,3701.77 h47.6 r90
  text "5" at 3808.46,3701.77 h47.6 r90
  text "4" at 3908.46,3701.77 h47.6 r90
  text "3" at 4008.46,3701.77 h47.6 r90
  text "2" at 4108.46,3701.77 h47.6 r90
  text "1" at 4208.46,3701.77 h47.6 r90
  text "0" at 4308.46,3701.77 h47.6 r90
  text "22" at 5333.46,3701.77 h47.6
  text "14" at 4508.46,3666.77 h47.6 r90
  text "15" at 4608.46,3666.77 h47.6 r90
  text "16" at 4708.46,3666.77 h47.6 r90
  text "17" at 4808.46,3666.77 h47.6 r90
  text "18" at 4908.46,3666.77 h47.6 r90
  text "19" at 5008.46,3666.77 h47.6 r90
  text "20" at 5108.46,3666.77 h47.6 r90
  text "21" at 5208.46,3666.77 h47.6 r90
  text "13" at 2958.46,3651.77 h47.6 r90
  text "12" at 3058.46,3651.77 h47.6 r90
  text "11" at 3158.46,3651.77 h47.6 r90
  text "10" at 3258.46,3651.77 h47.6 r90
  text "24" at 5333.46,3601.77 h47.6
  text "26" at 5333.46,3501.77 h47.6
  text "28" at 5333.46,3401.77 h47.6
  text "30" at 5333.46,3301.77 h47.6
  text "31" at 5658.46,3301.77 h47.6
  text "32" at 5333.46,3201.77 h47.6
  text "33" at 5658.46,3201.77 h47.6
  text "34" at 5333.46,3101.77 h47.6
  text "35" at 5658.46,3101.77 h47.6
  text "36" at 5333.46,3001.77 h47.6
  text "37" at 5658.46,3001.77 h47.6
  text "38" at 5333.46,2901.77 h47.6
  text "39" at 5658.46,2901.77 h47.6
  text "40" at 5333.46,2801.77 h47.6
  text "41" at 5658.46,2801.77 h47.6
  text "42" at 5333.46,2701.77 h47.6
  text "43" at 5658.46,2701.77 h47.6
  text "www.arduino.cc" at 4203.46,2626.77 h73.1
  text "44" at 5333.46,2601.77 h47.6
  text "45" at 5658.46,2601.77 h47.6
  text "46" at 5333.46,2501.77 h47.6
  text "47" at 5658.46,2501.77 h47.6
  text "TM" at 4398.46,2431.77 h34
  text "48" at 5333.46,2401.77 h47.6
  text "49" at 5658.46,2401.77 h47.6
  text "50" at 5333.46,2301.77 h47.6
  text "51" at 5658.46,2301.77 h47.6
  text "52" at 5333.46,2201.77 h47.6
  text "53" at 5658.46,2201.77 h47.6
  text "0" at 3813.46,2011.77 h47.6 r90
  text "1" at 3903.46,2011.77 h47.6 r90
  text "2" at 4013.46,2011.77 h47.6 r90
  text "3" at 4113.46,2011.77 h47.6 r90
  text "4" at 4213.46,2011.77 h47.6 r90
  text "5" at 4308.46,2011.77 h47.6 r90
  text "6" at 4408.46,2011.77 h47.6 r90
  text "7" at 4513.46,2011.77 h47.6 r90
  text "8" at 4713.46,2011.77 h47.6 r90
  text "9" at 4813.46,2011.77 h47.6 r90
  text "10" at 4913.46,2011.77 h47.6 r90
  text "11" at 5013.46,2011.77 h47.6 r90
  text "12" at 5113.46,2011.77 h47.6 r90
  text "13" at 5213.46,2011.77 h47.6 r90
  text "14" at 5313.46,2011.77 h47.6 r90
  text "15" at 5408.46,2011.77 h47.6 r90
ReferenceLC:
  text "L" at 2978.46,3456.77 h42.5
  text "ON" at 4648.46,3316.77 h42.5
  text "TX" at 2958.46,3241.77 h42.5
  text "RX" at 2958.46,3151.77 h42.5
  text "PC2" at 2728.46,2171.77 h42.5
  text "PC1" at 2453.46,2166.77 h42.5